# Altium PCB SRP 70_50mm_Release_2022-02-03.pcbdoc
Units mm, origin at the board's own origin, x right, y up, seen from the top; angles counter-clockwise.
Board outline 177.89 x 114.59 mm, 2 copper layers (Top Layer, Bottom Layer); 35 components, 25 nets, 122 pads, 30 vias.
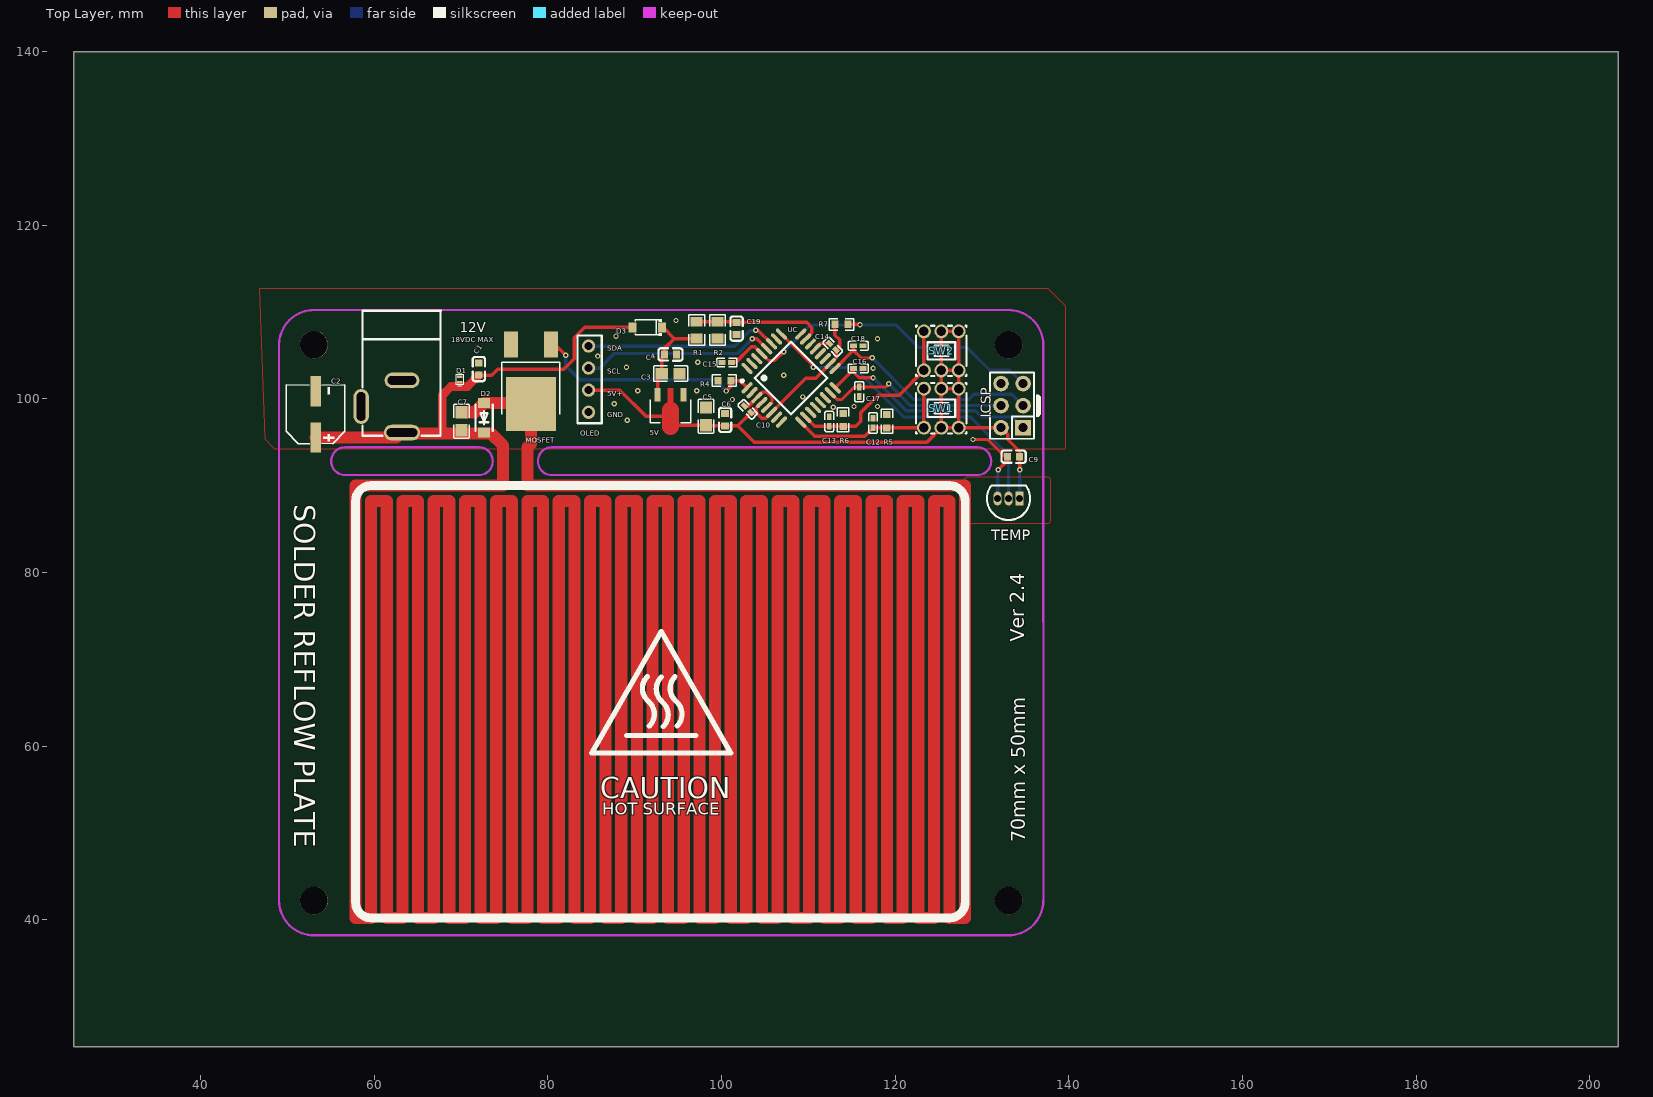
[diagram p0: Top Layer view]
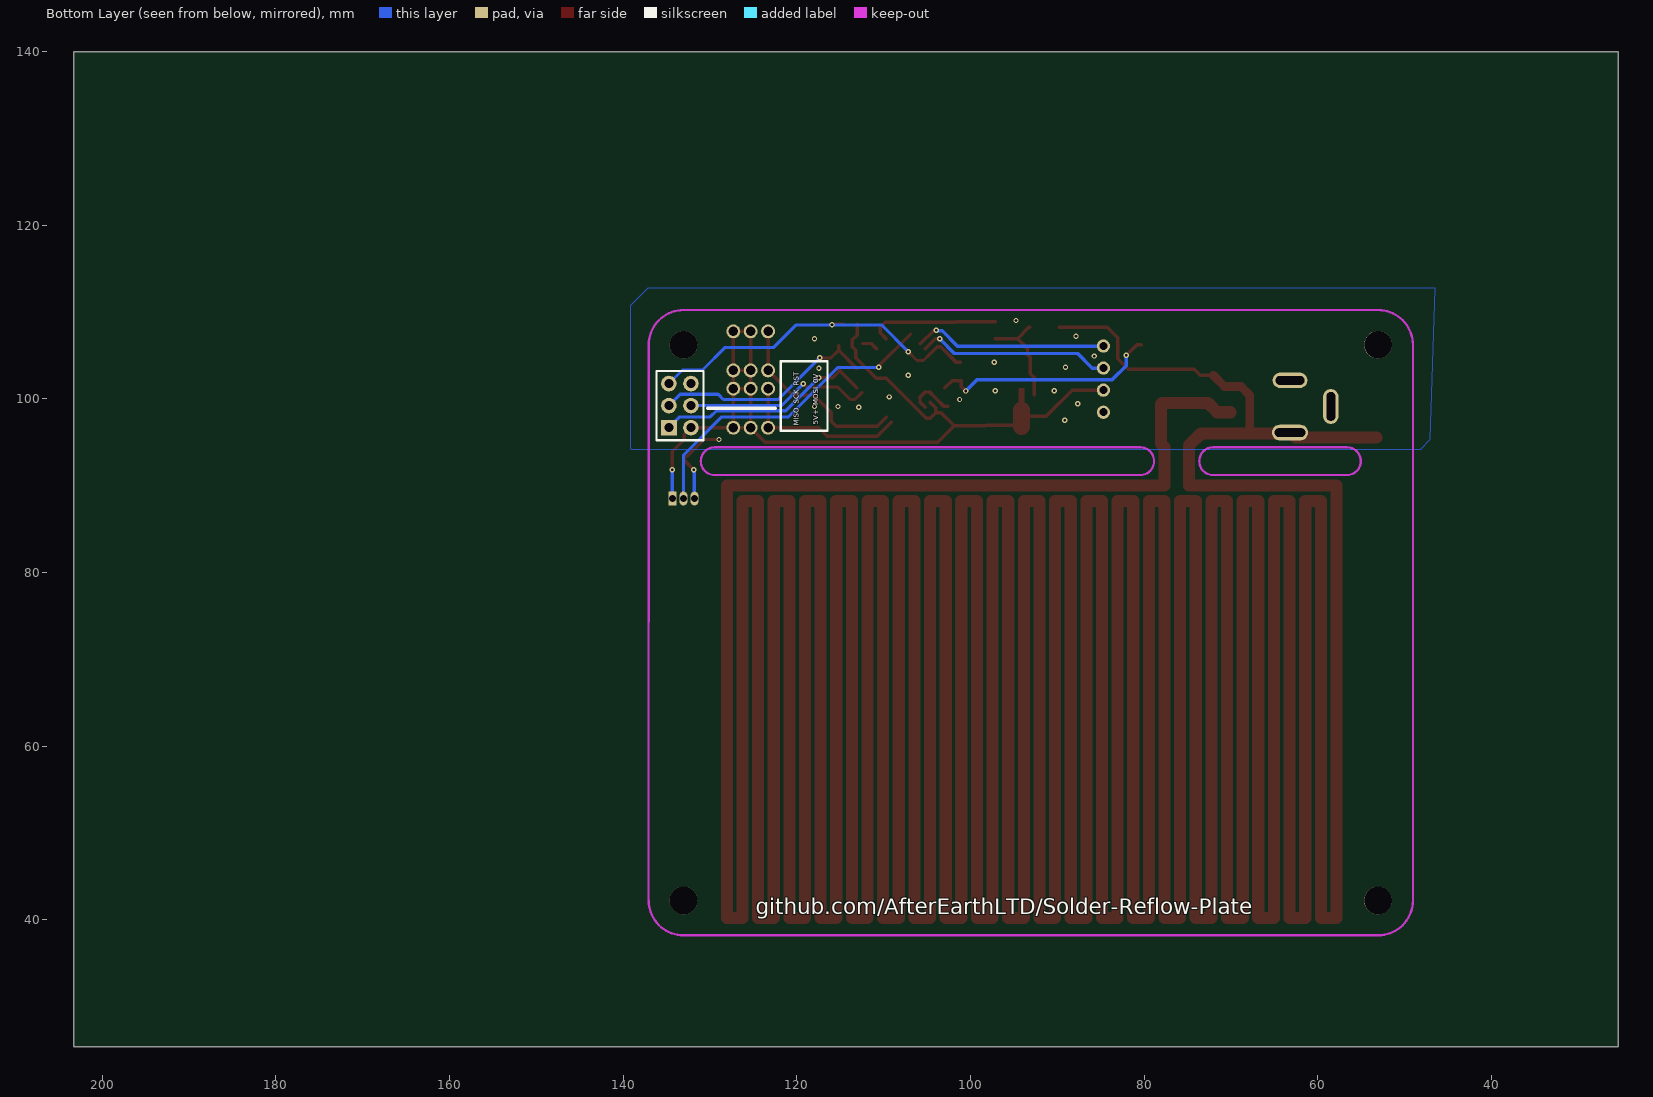
[diagram p1: Bottom Layer view, seen from below]

## Layer stack, top to bottom
Top Layer: signal copper (thickness not stored)
Dielectric: dielectric 0.32, FR-4, Dk 4.8
Bottom Layer: signal copper (thickness not stored)

## Board outline
203.293,25.4 25.4,25.4 25.4,139.993 203.293,139.993

## Components (designator, comment, footprint, x,y, rotation, side; value= is the part's Value field where it differs from the comment)
5V "AMS1117-5.0S" SOT-89_L4.5-W2.5-P1.50-LS4.2-BR 94.146,99.11 r90 top
12V "DC-005-5A-2.5" DC-IN-TH_DC-005-5A-2.5 60.866,99.127 r270 top
C1 "100nF" C0603 72.066,103.427 r270 top
C2 "100uF" CAP-SMD_BD6.3-L6.6-W6.6-LS7.6-FD 53.266,98.227 r90 top
C3 "22uF" C0805 94.146,102.91 r180 top
C4 "100nF" C0603 94.146,105.11 r0 top
C5 "22uF" C0805 98.225,97.992 r270 top
C6 "100nF" C0603 100.425,97.592 r90 top
C7 "1nF" C0805 70.066,97.427 r90 top
C9 "100nF" C0603 133.648,93.345 r180 top
C10 "10nF" C0402 103.025,98.792 r135 top
C12 "10nF" C0402 117.466,97.227 r270 top
C13 "10nF" C0402 112.425,97.392 r270 top
C14 "10nF" C0402 112.825,105.992 r315 top
C15 "10nF" C0402 100.625,104.192 r180 top
C16 "10nF" C0402 115.746,103.51 r180 top
C17 "10nF" C0402 115.866,100.827 r90 top
C18 "10nF" C0402 115.746,106.11 r180 top
C19 "100nF" C0603 101.746,108.11 r90 top
D1 "PESDMC2FD18VB" SOD-882_L1.0-W0.6-BI 69.866,102.227 r270 top
D2 "MM1Z24" SOD-123_L2.8-W1.8-LS3.7-FD 72.666,97.827 r270 top
D3 "DSR1M_C908221" SOD-123_L2.8-W1.8-LS3.7-RD 91.466,108.227 r180 top
ICSP "Header-Male-2.54_2x3" HDR-TH_6P-P2.54-V-M-R2-C3-S2.54-1 133.466,99.227 r90 top
MOSFET "UMW30N06" TO-252-2_L6.6-W6.1-P4.57-LS9.9-BR-CW 78.066,102.827 r90 top
OLED "OLED 0.91\"" OLED_0.91_128X32 82.166,108.627 r0 top
R1 "3K" R0805 97.146,107.91 r90 top
R2 "1K" R0805 99.546,107.91 r90 top
R4 "10K" R0603 100.346,102.111 r0 top
R5 "10K" R0603 119.066,97.427 r90 top
R6 "10K" R0603 114.024,97.592 r90 top
R7 "10K" R0603 113.826,108.593 r180 top
SW1 "K8-5851E-N1_C134191" SW-TH_6P-L5.8-W5.8-P2.00-LS4.5-BL 125.323,98.928 r180 top
SW2 "K8-5851E-N1_C134191" SW-TH_6P-L5.8-W5.8-P2.00-LS4.5-BL 125.323,105.53 r180 top
TEMP "LMT85LP" TO-92-3_L4.9-W3.7-P1.27-L 133.066,88.527 r180 top
UC "ATMEGA328P-AU" TQFP-32_L7.0-W7.0-P0.80-LS9.0-BL 108.025,102.392 r315 top

## Footprints (in the part's own frame and the unit in brackets; to place one, negate y for a bottom-side part, rotate by r counter-clockwise, add the part's x,y. Pads: shape width x height; smd on the part's side, far side on the other; paste and mask are expansions set on the pad)
C0402 [mm]
  rect 0.79x0.54 smd: 1(-0.545,0) 2(0.545,0)
  silkscreen extent -1.17,-0.5 1.17,0.5
C0603 [mm]
  rect 0.8x0.9 smd: 1(-0.7,0) 2(0.7,0)
  silkscreen extent -1.41,-0.71 1.39,0.72
C0805 [mm]
  rect 1.41x1.35 smd: 1(-1.03,0) 2(1.03,0)
  silkscreen extent -1.96,-0.9 1.96,0.9
CAP-SMD_BD6.3-L6.6-W6.6-LS7.6-FD [mm]
  rect 3.5x1.2 smd: 1(-2.67,0) 2(2.67,0)
  silkscreen extent -3.38,-3.38 3.38,3.38
DC-IN-TH_DC-005-5A-2.5 [mm]
  oval 1.8x4.2 hole 1 slot 3.5 at 90 deg: 1(3,2.352)
  oval 1.8x4 hole 1 slot 3.3 at 90 deg: 2(-3,2.352)
  oval 4x1.8 hole 1 slot 3.3 at 0 deg: 3(0,-2.352)
  silkscreen extent -11.03,-2.2 3.38,6.81
HDR-TH_6P-P2.54-V-M-R2-C3-S2.54-1 [mm]
  rect 1.8x1.8 hole 1.05: 1(-2.54,-1.27)
  round 1.8 hole 1.05: 2(-2.54,1.27) 3(0,-1.27) 4(0,1.27) 5(2.54,-1.27) 6(2.54,1.27)
  silkscreen extent -3.81,-2.54 3.81,2.54
OLED_0.91_128X32 [mil]
  round 60 hole 36: 1(100,-100) 2(100,-200) 3(100,-300) 4(100,-400)
  silkscreen extent 50,-450 160,-52
R0603 [mm]
  rect 0.806x0.864 smd: 1(-0.753,0) 2(0.753,0)
  silkscreen extent -1.39,-0.66 1.39,0.66
R0805 [mm]
  rect 1.133x1.377 smd: 1(-0.966,0) 2(0.966,0)
  silkscreen extent -1.76,-0.92 1.76,0.92
SOD-123_L2.8-W1.8-LS3.7-FD [mm]
  rect 1.2x1.4 smd: 1(-1.7,0) 2(1.7,0)
  silkscreen extent -1.5,-1 1.5,1
SOD-123_L2.8-W1.8-LS3.7-RD [mm]
  rect 0.95x1.15 smd: 1(-1.693,0) 2(1.693,0)
  silkscreen extent -1.63,-0.94 1.41,0.94
SOD-882_L1.0-W0.6-BI [mm]
  rect 0.3x0.6 smd: 1(-0.325,0) 2(0.325,0)
  silkscreen extent -0.75,-0.4 0.75,0.4
SOT-89_L4.5-W2.5-P1.50-LS4.2-BR [mm]
  rect 1.575x0.672 smd: 1(1.356,-1.5) 3(1.356,1.5)
  round 0 smd: 2(-1.356,0.009)
  Top Layer region: -2.283,0.959 -0.429,0.959 -0.385,0.958 -0.34,0.955 -0.296,0.949 -0.252,0.942 -0.208,0.933 -0.165,0.921 -0.123,0.908 -0.081,0.893 -0.04,0.875 0,0.856 0.04,0.835 0.078,0.812 0.115,0.788 0.151,0.761 0.185,0.733 0.219,0.704 0.251,0.673 0.281,0.64 0.31,0.606 0.337,0.571 0.362,0.534 0.386,0.497 0.408,0.458 0.428,0.418 0.447,0.339 2.144,0.339 2.144,-0.321 0.447,-0.321 0.428,-0.401 0.408,-0.44 0.386,-0.479 0.362,-0.517 0.337,-0.553 0.31,-0.588 0.281,-0.622 0.251,-0.655 0.219,-0.686 0.185,-0.716 0.151,-0.744 0.115,-0.77 0.078,-0.795 0.04,-0.818 0,-0.839 -0.04,-0.858 -0.081,-0.875 -0.123,-0.89 -0.165,-0.904 -0.208,-0.915 -0.252,-0.925 -0.296,-0.932 -0.34,-0.937 -0.385,-0.94 -0.429,-0.941 -2.283,-0.941 -2.328,-0.94 -2.372,-0.937 -2.416,-0.932 -2.46,-0.925 -2.504,-0.915 -2.547,-0.904 -2.589,-0.89 -2.631,-0.875 -2.672,-0.858 -2.713,-0.839 -2.752,-0.818 -2.79,-0.795 -2.827,-0.77 -2.863,-0.744 -2.898,-0.716 -2.931,-0.686 -2.963,-0.655 -2.993,-0.622 -3.022,-0.588 -3.049,-0.553 -3.075,-0.517 -3.098,-0.479 -3.12,-0.44 -3.141,-0.401 -3.159,-0.36 -3.175,-0.318 -3.189,-0.276 -3.202,-0.233 -3.212,-0.19 -3.22,-0.146 -3.227,-0.102 -3.231,-0.058 -3.233,-0.013 -3.233,0.031 -3.231,0.076 -3.227,0.12 -3.22,0.164 -3.212,0.208 -3.202,0.251 -3.189,0.294 -3.175,0.336 -3.159,0.377 -3.141,0.418 -3.12,0.458 -3.098,0.497 -3.075,0.534 -3.049,0.571 -3.022,0.606 -2.993,0.64 -2.963,0.673 -2.931,0.704 -2.898,0.733 -2.863,0.761 -2.827,0.788 -2.79,0.812 -2.752,0.835 -2.713,0.856 -2.672,0.875 -2.631,0.893 -2.589,0.908 -2.547,0.921 -2.504,0.933 -2.46,0.942 -2.416,0.949 -2.372,0.955 -2.328,0.958
  silkscreen extent -1.87,-2.33 0.78,2.33
SW-TH_6P-L5.8-W5.8-P2.00-LS4.5-BL [mm]
  round 1.6 hole 1.1: 1(-2,-2.25) 2(0,-2.25) 3(2,-2.25) 4(-2,2.25) 5(0,2.25) 6(2,2.25)
  silkscreen extent -2.9,-2.9 2.9,2.9
TO-92-3_L4.9-W3.7-P1.27-L [mm]
  rect 0.9x1.6 hole 0.8: 1(-1.27,0)
  oval 0.9x1.6 hole 0.8: 2(0,0) 3(1.27,0)
  silkscreen extent -2.48,-1.5 2.48,2.48
TO-252-2_L6.6-W6.1-P4.57-LS9.9-BR-CW [mm]
  rect 3x1.6 smd: 1(3.424,-2.29) 3(3.424,2.29)
  rect 6.2x5.8 smd: 2(-3.424,0)
  silkscreen extent -4.58,-3.35 1.38,3.35
TQFP-32_L7.0-W7.0-P0.80-LS9.0-BL [mm]
  oval 0.45x1.65 smd: 1(-2.8,-4.369) 2(-2,-4.369) 3(-1.2,-4.369) 4(-0.4,-4.369) 5(0.4,-4.369) 6(1.2,-4.369) 7(2,-4.369) 8(2.8,-4.369) 17(2.8,4.369) 18(2,4.369) 19(1.2,4.369) 20(0.4,4.369) 21(-0.4,4.369) 22(-1.2,4.369) 23(-2,4.369) 24(-2.8,4.369)
  oval 1.65x0.45 smd: 9(4.382,-2.8) 10(4.382,-2) 11(4.381,-1.2) 12(4.381,-0.4) 13(4.381,0.4) 14(4.381,1.2) 15(4.382,2) 16(4.382,2.8) 25(-4.382,2.8) 26(-4.382,2) 27(-4.381,1.2) 28(-4.381,0.4) 29(-4.381,-0.4) 30(-4.381,-1.2) 31(-4.382,-2) 32(-4.382,-2.8)
  silkscreen extent -3.91,-4.36 2.94,2.95

## Free pads (board coordinates)
  round 3.2 hole 3.2 unplated: ""(53.066,42.227) ""(53.066,106.227) ""(133.066,42.227) ""(133.066,106.227)

## Via types
v1: diameter 0.61, hole 0.305, Top Layer to Bottom Layer, tented both sides, 30 vias

## Nets (pads, with @x,y where several pads share a name; then routed paths per layer and width w, separated by ;. In a path a pad name is that pad's centre, name@x,y a point inside that pad or via, vN(x,y) a via of type N, cw(c..) or ccw(c..) an arc to the next point about the centre after c; other vN are vias at no path point)
0V: 5V.1 12V.2 12V.3 C1.1 C2.2 C3.1 C4.2 C5.1 C6.2 C9.2 C10.2 C12.1 C13.1 C14.1 C15.2 C16.1 C17.1 C18.1 C19.1 D1.1 ICSP.6 MOSFET.3 OLED.4 R2.1 R4.1 R5.2 R6.2 TEMP.3 UC.3 UC.5 UC.21 | length 17.5
  Top Layer w0.36: v1(128.966,95.327) 130.666,95.327 132.648,93.345 C9.2
  Top Layer w0.4: C10.2 103.114,99.178 UC.3 104.728,100.792 105.225,100.792 105.825,100.192 105.825,99.626 UC.5 ; UC.21 111.445,106.377 C14.1 ; v1(131.866,91.827) 132.948,92.909 C9.2
  Bottom Layer w0.4: TEMP.3 131.797,91.757 v1(131.866,91.827)
  other v1: 89.166,97.527 112.866,99.027 115.266,99.127 117.966,99.127 87.666,99.427 101.266,99.927 109.366,100.227 90.366,100.927 97.166,100.927 107.166,102.727 117.467,103.527 89.066,103.627 97.266,104.227 85.766,104.927 117.966,106.927 87.866,107.227 94.766,109.027
5V+: 5V.2 C5.2 C6.1 C9.1 C10.1 C14.2 ICSP.2 OLED.3 R7.2 SW1.1 SW1.2 SW1.4 SW1.5 SW2.1 SW2.2 SW2.4 SW2.5 TEMP.1 UC.4 UC.6 UC.18 | length 108.7
  Top Layer w0.36: ICSP.2 132.966,95.917 132.966,95.327 134.348,93.945 C9.1
  Top Layer w0.4: OLED.3 88.286,101.007 91.266,98.027 93.863,98.027 5V.2 94.928,96.962 C5.2 98.295,96.892 100.425,96.892 101.896,96.892 C10.1 104.011,98.407 104.026,98.391 ; 101.896,96.891 103.76,95.026 123.671,95.026 SW1.5@125.322,96.677 ; UC.4 104.025,98.958 104.025,98.392 104.625,97.792 105.122,97.792 UC.6 109.722,102.392 110.854,102.392 UC.18 113.211,104.749 C14.2 113.625,106.021 113.625,106.792 113.072,107.345 R7.2@113.072,108.592 ; SW1.2@125.321,101.178 SW1.1@127.321,101.178 ; SW2.5@125.321,103.278 SW2.4@127.321,103.278 ; SW1.4 ICSP.2@132.195,96.688 ; C9.1 134.348,91.845 v1(134.366,91.827) ; SW1.5@125.321,96.678 127.321,96.678 127.321,107.778 125.321,107.778 SW1.5@125.321,96.678
  Bottom Layer w0.4: TEMP.1 134.337,91.797 v1(134.366,91.827)
GATE: MOSFET.1 R4.2 UC.1 | length 26.7
  Top Layer w0.4: MOSFET.1 80.842,106.251 v1(82.066,105.027) ; v1(100.546,100.91) 101.099,101.463 R4.2 102.13,102.11 UC.1
  Bottom Layer w0.4: v1(82.066,105.027) 82.066,103.827 83.666,102.227 99.228,102.227 v1(100.546,100.91)
MISO: C16.2 ICSP.1 UC.16 | length 25.6
  Top Layer w0.36: C16.2@115.2,103.37 115.2,103.094 115.866,102.428 v1@117.466,102.428
  Top Layer w0.4: UC.16 115.201,103.371 C16.2
  Bottom Layer w0.36: v1@117.466,102.428 121.266,98.628 129.267,98.628 129.965,97.927 133.496,97.927 ICSP.1@134.735,96.688
  other v1: 117.467,102.427
MOSI: C17.2 ICSP.4 UC.15 | length 21.8
  Top Layer w0.36: UC.15 113.319,99.927 113.866,99.927 115.311,101.372 C17.2 118.912,101.372 v1(119.267,101.727)
  Bottom Layer w0.36: v1(119.267,101.727) 121.766,99.228 ICSP.4@132.195,99.228
NULL: 
RESET: C15.1 ICSP.5 R7.1 UC.29 | length 40.9
  Top Layer w0.36: UC.29 105.425,104.427 106.166,104.427 v1(107.166,105.427) ; R7.1 115.901,108.592 v1(115.966,108.527)
  Top Layer w0.4: C15.1@101.17,104.192 101.625,104.192 103.425,105.992 103.86,105.992 UC.29
  Bottom Layer w0.36: v1(107.166,105.427) 110.266,108.527 v1(115.966,108.527) ; v1(115.966,108.527) 120.067,108.527 122.665,105.928 128.266,105.928 130.867,103.327 133.176,103.327 ICSP.5@134.735,101.768
S$2640: 
S$2645: 
S$2657: 
S$2663: 
S$2689: 
S$2691: 
S$2693: 
S$2739: 
S$10618: 
SCK: C18.2 ICSP.3 UC.17 | length 26.2
  Top Layer w0.36: 115.201,105.608 116.081,104.727 v1(117.366,104.727)
  Top Layer w0.4: UC.17 115.201,105.608 C18.2
  Bottom Layer w0.36: v1(117.366,104.727) 122.165,99.926 128.464,99.926 129.066,100.528 133.438,100.528 ICSP.3@134.735,99.228
SCKOLED: OLED.2 UC.28 | length 22.4
  Top Layer w0.4: v1(103.546,106.91) 104.074,106.91 UC.28
  Bottom Layer w0.4: OLED.2 85.987,103.547 87.666,105.227 101.863,105.227 v1(103.546,106.91)
SDAOLED: OLED.1 UC.27 | length 22.5
  Top Layer w0.4: v1(103.946,107.91) 104.205,107.91 UC.27
  Bottom Layer w0.4: OLED.1 101.527,106.087 103.267,107.828 103.864,107.828 v1@103.946,107.909
SW1: C12.2 R5.1 SW1.3 SW1.6 UC.9 | length 19.8
  Top Layer w0.4: UC.9 110.748,95.71 116.494,95.71 C12.2 ; C12.2@117.466,96.624 C12.2 ; SW1.6@123.321,96.678 SW1.3@123.321,101.178 ; SW1.6 123.319,96.674 119.066,96.674 C12.2
SW2: C13.2 R6.1 SW2.3 SW2.6 UC.10 | length 21.8
  Top Layer w0.4: UC.10 110.75,96.839 114.025,96.839 115.478,96.839 116.066,97.427 116.066,98.427 118.066,100.427 120.471,100.427 SW2.6 ; SW2.6@123.321,103.278 SW2.3@123.321,107.778
TEMPDATA: TEMP.2 UC.25 | length 37
  Top Layer w0.36: UC.25 110.566,103.811 v1(110.566,103.627)
  Bottom Layer w0.36: v1(110.566,103.627) 115.266,103.627 120.966,97.927 128.667,97.927 133.067,93.528 TEMP.2
VCC: 12V.1 C1.2 C2.1 C7.1 C7.2 D1.2 D2.1 D2.2 D3.2 MOSFET.2 | length 2137.2
  Top Layer w0.4: C1.2@72.066,102.728 73.567,102.728 74.266,103.426 81.865,103.426 83.067,104.628 83.067,107.028 84.266,108.227 D3.2
  Top Layer w1: 67.866,96.027 67.866,100.427 68.866,101.427 70.766,101.427 C1.2
  Top Layer w1.4: C2.1 62.548,95.557 12V.1@63.018,96.027 ; 57.866,88.227 57.866,40.227 59.666,40.227 59.666,88.227 61.466,88.227 61.466,40.227 63.266,40.227 63.266,88.227 65.066,88.227 65.066,40.227 66.866,40.227 66.866,88.227 68.666,88.227 68.666,40.227 70.466,40.227 70.466,88.227 72.266,88.227 72.266,40.227 74.066,40.227 74.066,88.227 75.866,88.227 75.866,40.227 77.666,40.227 77.666,88.227 79.466,88.227 79.466,40.227 81.266,40.227 81.266,88.227 83.066,88.227 83.066,40.227 84.867,40.227 84.867,88.227 86.666,88.227 86.666,40.227 88.467,40.227 88.467,88.227 90.266,88.227 90.266,40.227 92.067,40.227 92.067,88.227 93.867,88.227 93.867,40.227 95.667,40.227 95.667,88.227 97.467,88.227 97.467,40.227 99.267,40.227 99.267,88.227 101.067,88.227 101.067,40.227 102.867,40.227 102.867,88.227 104.667,88.227 104.667,40.227 106.467,40.227 106.467,88.227 108.267,88.227 108.267,40.227 110.067,40.227 110.067,88.227 111.867,88.227 111.867,40.227 113.667,40.227 113.667,88.227 115.467,88.227 115.467,40.227 117.267,40.227 117.267,88.227 119.067,88.227 119.067,40.227 120.867,40.227 120.867,88.227 122.667,88.227 122.667,40.227 124.467,40.227 124.467,88.227 126.267,88.227 126.267,40.227 128.067,40.227 128.067,88.227 ; 57.867,88.227 57.867,90.028 74.865,90.028 74.865,94.628 73.466,96.027 12V.1@63.019,96.027 ; C7.2 71.596,98.457 D2.1 77.942,99.527 MOSFET.2 78.066,94.827 77.667,94.428 77.667,90.027 128.066,90.027 128.066,88.228
VCCDIV: C19.2 R1.2 R2.2 UC.23 | length 15.2
  Top Layer w0.4: R1.2 101.68,108.876 C19.2 109.808,108.81 110.425,108.192 110.425,107.62 UC.23
VIN-D: 5V.3 C3.2 C4.1 D3.1 R1.1 | length 11.8
  Top Layer w0.4: 5V.3 92.646,102.439 C3.2 93.116,104.78 C4.1 93.446,105.806 94.583,106.943 ; D3.1 93.299,108.227 94.583,106.943 ; R1.1 94.583,106.943
pads on no net: UC.2 UC.7 UC.8 UC.11 UC.12 UC.13 UC.14 UC.19 UC.20 UC.22 UC.24 UC.26 UC.30 UC.31 UC.32

## Polygon pours and split planes (outlines as drawn)
0V on Bottom Layer (solid): 46.466,112.727 137.166,112.727 139.166,110.727 139.166,94.327 139.066,94.227 48.166,94.227 47.066,95.327
VCC on Top Layer (solid): 128.266,91.027 137.666,91.027 137.866,90.827 137.866,89.827 137.866,85.827 137.666,85.627 128.266,85.627 127.866,90.627
0V on Top Layer (solid): 46.866,112.727 137.566,112.727 139.566,110.727 139.566,94.327 139.466,94.227 48.566,94.227 47.466,95.327

## Keep-outs
Keep-Out Layer:
  lines w0.254: 49.066,42.227 ccw(c53.066,42.227) 53.066,38.227 ; 49.066,106.227 cw(c53.066,106.227) 53.066,110.227 ; 133.066,38.227 ccw(c133.066,42.227) 137.066,42.227 ; 133.066,110.227 cw(c133.066,106.227) 137.066,106.227
  lines w0.254 net VCC: 56.666,91.227 cw(c56.666,92.827) 55.066,92.827 cw(c56.666,92.827) 56.666,94.427 ; 72.066,91.227 ccw(c72.066,92.827) 73.666,92.827 ccw(c72.066,92.827) 72.066,94.427 ; 80.466,91.227 cw(c80.466,92.827) 78.866,92.827 cw(c80.466,92.827) 80.466,94.427 ; 129.466,91.227 ccw(c129.466,92.827) 131.066,92.827 ccw(c129.466,92.827) 129.466,94.427

## Silkscreen, mask and mechanical layers (free items; w line width, h text height)
Top Overlay:
  region: 136.26,97.957 136.26,100.497 136.514,100.497 136.768,100.243 136.768,98.211 136.514,97.957
  lines w0.6 net S$2689: 85.066,59.227 101.066,59.227
  lines w0.6 net S$2691: 85.066,59.227 93.066,73.227 101.066,59.227
  lines w0.6 net S$2693: 89.066,61.227 97.066,61.227
  lines w0.6 net S$2739: 91.466,68.027 ccw(c92.832,66.661) 90.901,66.661 ccw(c92.832,66.661) 91.466,65.296 91.701,65.061 cw(c90.335,63.696) 92.266,63.696 cw(c90.335,63.696) 91.701,62.33 ; 93.066,67.958 ccw(c94.432,66.593) 92.501,66.593 ccw(c94.432,66.593) 93.066,65.227 93.301,64.993 cw(c91.935,63.627) 93.866,63.627 cw(c91.935,63.627) 93.301,62.261 ; 94.666,68.027 ccw(c96.032,66.661) 94.101,66.661 ccw(c96.032,66.661) 94.666,65.296 94.901,65.061 cw(c93.535,63.696) 95.466,63.696 cw(c93.535,63.696) 94.901,62.33
  lines w1 net S$2640: 59.666,40.227 126.266,40.227
  lines w1 net S$2645: 59.666,90.027 126.266,90.027
  lines w1 net S$2657: 59.666,40.227 cw(c59.666,42.027) 57.866,42.027 57.866,88.227 cw(c59.666,88.227) 59.666,90.027
  lines w1 net S$2663: 126.266,40.227 ccw(c126.266,42.027) 128.066,42.027 128.066,88.227 ccw(c126.266,88.227) 126.266,90.027
  text "18VDC MAX" at 68.866,106.527 h0.6
  text "SOLDER REFLOW PLATE" at 50.822,87.888 h2.4 r270
  text "Ver 2.4" at 134.866,72.027 h1.6 r90
  text "CAUTION" at 86.066,54.027 h2.4
  text "HOT SURFACE" at 86.266,52.127 h1.4
  text "70mm x 50mm" at 134.967,48.927 h1.6 r90
Bottom Overlay:
  lines w0.254: 116.467,96.327 121.867,96.327 121.867,104.327 116.467,104.327 116.467,96.327 ; 130.766,95.227 136.167,95.227 136.167,103.227 130.766,103.227 130.766,95.227
  lines w0.36 net S$10618: 122.466,98.927 130.266,98.927
  text "5V+  MOSI  0V" at 117.566,97.027 h0.6 r270
  text "MISO  SCK  RST" at 119.766,96.927 h0.6 r270
  text "github.com/AfterEarthLTD/Solder-Reflow-Plate" at 124.766,40.627 h1.8
Document:
  lines w0.254: 141.066,102.027 190.466,102.027 190.466,110.127 141.066,110.127 141.066,102.027
  text "Switch Notch is on NO side." at 141.776,106.045 h2.03
  text "Notch should point towards LCD." at 141.766,102.611 h2.03

## Text inside footprints (layer, text, board x,y; h text height)
OLED: Document "OLED 128x32 0.91\"" at 96.39,101.471 h1.5; Top Overlay "5V+" at 86.85,100.319 h0.6; Top Overlay "GND" at 86.85,97.899 h0.6; Top Overlay "SCL" at 86.85,102.919 h0.6; Top Overlay "SDA" at 86.85,105.519 h0.6